# EAGLE board Keyboard (EAGLE 9.4.2)
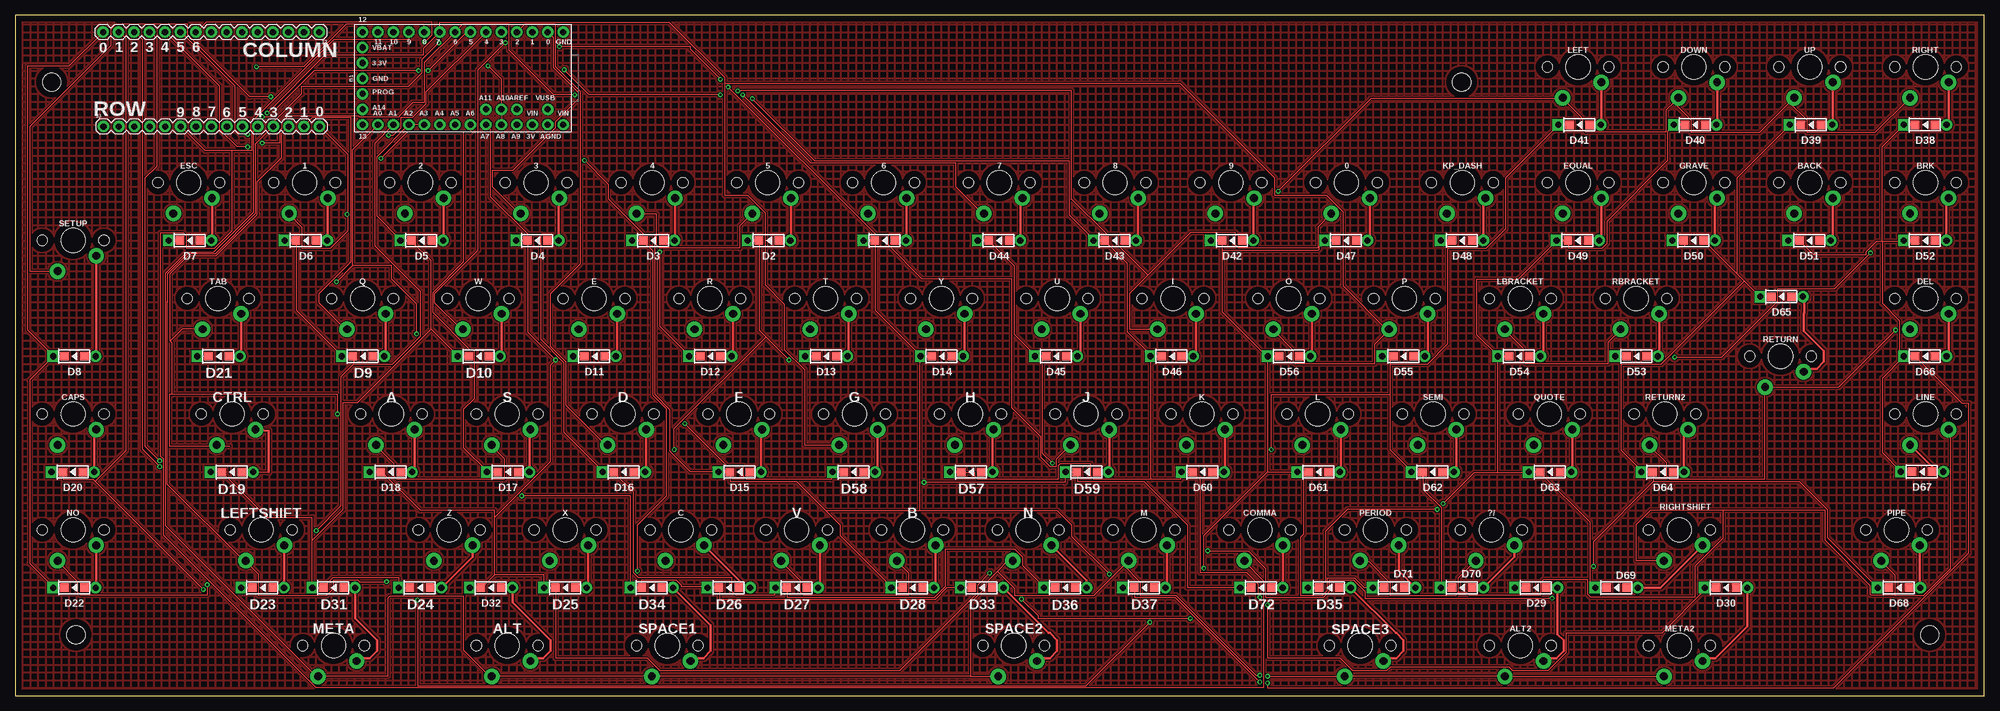
[diagram p0: board, top side]
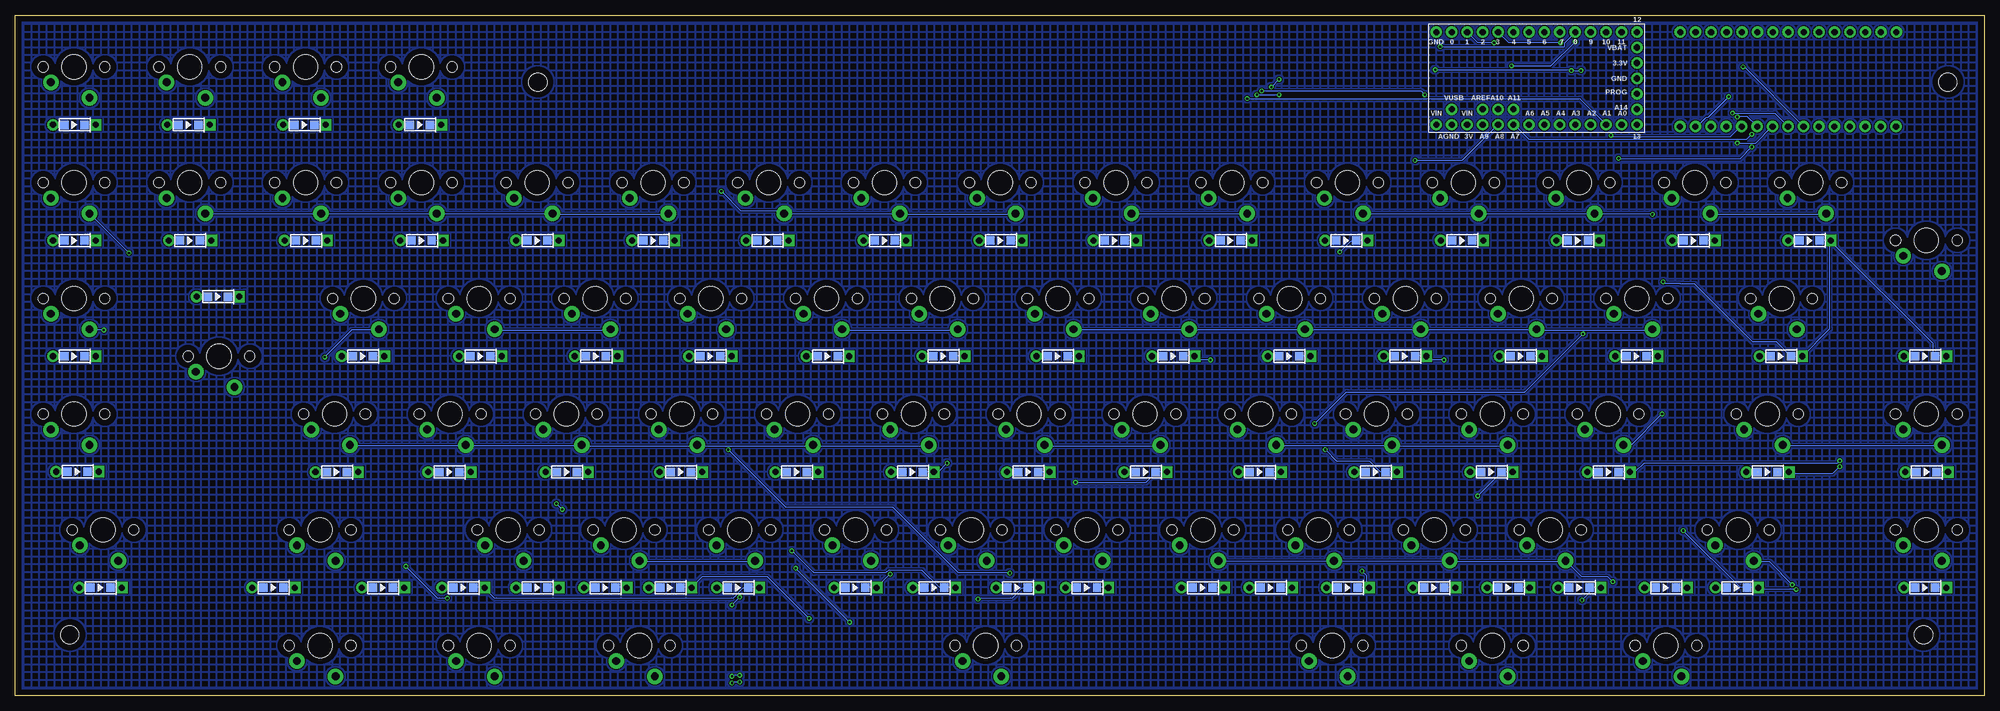
[diagram p1: board, bottom side, seen from below]

Size 324 x 112 mm. Coordinates in mm from the lower left corner, seen from the top.
Outline: 0,0 324,0 324,112 0,112 0,0
Copper layers (1*16): Top 0.035mm / dielectric 1.5mm / Bottom 0.035mm
Design rules "default": minimum track width 6mil, minimum drill 0.35mm, track to track 6mil, track to pad 6mil, pad to pad 6mil, via to via 6mil, smd to smd 6mil, copper to edge 40mil, drill to drill 6mil, minimum pad ring 10mil, minimum via ring 8mil, stop-mask expansion 4mil, vias tented up to drill 0mil, thermal gap 10mil
Holes 3 mm at 6,101 238,101 10,10 315,10

## Footprints (pad centres in the part's own frame; a part is rotated, then mirrored left to right if it is on the bottom)
MX-1U = drill 1.3 pad 2.54: MX1 -3.81,2.54; MX2 2.54,5.08 | hole 4: 0,0 | hole 1.7: -5.08,0; 5.08,0
TEENSY-3.1 = drill 1.016 pad 1.88: 0 7.62,-13.97; 1 7.62,-11.43; 2 7.62,-8.89; 3 7.62,-6.35; 3.3V 2.54,16.51; 3V -7.62,-11.43; 4 7.62,-3.81; 5 7.62,-1.27; 6 7.62,1.27; 7 7.62,3.81; 8 7.62,6.35; 9 7.62,8.89; 10 7.62,11.43; 11 7.62,13.97; 12 7.62,16.51; 13 -7.62,16.51; 14 -7.62,13.97; 15 -7.62,11.43; 16 -7.62,8.89; 17 -7.62,6.35; 18 -7.62,3.81; 19 -7.62,1.27; 20 -7.62,-1.27; 21 -7.62,-3.81; 22 -7.62,-6.35; 23 -7.62,-8.89; A10 -5.08,-6.35; A11 -5.08,-3.81; A14/DAC -5.08,16.51; AGND -7.62,-13.97; AREF -5.08,-8.89; GND 0,16.51; GND1 7.62,-16.51; PROG -2.54,16.51; VBAT 5.08,16.51; VIN -7.62,-16.51; VUSB -5.08,-13.97
DIODE_HAND = smd 1.397 x 1.397: A1 -1.651,0; C1 1.651,0 | drill 1 pad 1.9: A2 -3.5,0 | smd 1.397 x 1.397 bottom: A3 -1.651,0; C3 1.651,0 | drill 1 pad 1.9 square: C2 3.5,0
1X15 = drill 1.016 pad 1.88: 1 0,0; 2 2.54,0; 3 5.08,0; 4 7.62,0; 5 10.16,0; 6 12.7,0; 7 15.24,0; 8 17.78,0; 9 20.32,0; 10 22.86,0; 11 25.4,0; 12 27.94,0; 13 30.48,0; 14 33.02,0; 15 35.56,0

## Placement (x,y rotation side)
0  KEYSWITCH-PLAIN-MX-1U  [MX-1U]  219.07,84.43 180 top
1  KEYSWITCH-PLAIN-MX-1U  [MX-1U]  47.62,84.43 180 top
2  KEYSWITCH-PLAIN-MX-1U  [MX-1U]  66.67,84.43 180 top
3  KEYSWITCH-PLAIN-MX-1U  [MX-1U]  85.72,84.43 180 top
4  KEYSWITCH-PLAIN-MX-1U  [MX-1U]  104.77,84.43 180 top
5  KEYSWITCH-PLAIN-MX-1U  [MX-1U]  123.82,84.43 180 top
6  KEYSWITCH-PLAIN-MX-1U  [MX-1U]  142.87,84.43 180 top
7  KEYSWITCH-PLAIN-MX-1U  [MX-1U]  161.92,84.43 180 top
8  KEYSWITCH-PLAIN-MX-1U  [MX-1U]  180.97,84.43 180 top
9  KEYSWITCH-PLAIN-MX-1U  [MX-1U]  200.02,84.43 180 top
?/  KEYSWITCH-PLAIN-MX-1U  [MX-1U]  242.88,27.28 180 top
A  KEYSWITCH-PLAIN-MX-1U  [MX-1U]  61.91,46.33 180 top
ALT  KEYSWITCH-PLAIN-MX-1U  [MX-1U]  80.96,8.23 180 top
ALT2  KEYSWITCH-PLAIN-MX-1U  [MX-1U]  247.65,8.23 180 top
B  KEYSWITCH-PLAIN-MX-1U  [MX-1U]  147.63,27.28 180 top
B1  TEENSY-3.1SILK  [TEENSY-3.1]  73.66,101.6 90 top
BACK  KEYSWITCH-PLAIN-MX-1U  [MX-1U]  295.27,84.43 180 top
BRK  KEYSWITCH-PLAIN-MX-1U  [MX-1U]  314.32,84.43 180 top
C  KEYSWITCH-PLAIN-MX-1U  [MX-1U]  109.53,27.28 180 top
CAPS  KEYSWITCH-PLAIN-MX-1U  [MX-1U]  9.52,46.33 180 top
COMMA  KEYSWITCH-PLAIN-MX-1U  [MX-1U]  204.78,27.28 180 top
CTRL  KEYSWITCH-PLAIN-MX-1U  [MX-1U]  35.72,46.33 180 top
D  KEYSWITCH-PLAIN-MX-1U  [MX-1U]  100.01,46.33 180 top
D1  [DIODE_HAND]  143.08,74.91 180 top
D2  [DIODE_HAND]  124.03,74.91 180 top
D3  [DIODE_HAND]  104.98,74.91 180 top
D4  [DIODE_HAND]  85.93,74.91 180 top
D5  [DIODE_HAND]  66.88,74.91 180 top
D6  [DIODE_HAND]  47.83,74.91 180 top
D7  [DIODE_HAND]  28.78,74.91 180 top
D8  [DIODE_HAND]  9.73,55.85 180 top
D9  [DIODE_HAND]  57.23,55.85 180 top
D10  [DIODE_HAND]  76.28,55.85 180 top
D11  [DIODE_HAND]  95.33,55.85 180 top
D12  [DIODE_HAND]  114.38,55.85 180 top
D13  [DIODE_HAND]  133.43,55.85 180 top
D14  [DIODE_HAND]  152.48,55.85 180 top
D15  [DIODE_HAND]  119.21,36.8 180 top
D16  [DIODE_HAND]  100.16,36.8 180 top
D17  [DIODE_HAND]  81.11,36.8 180 top
D18  [DIODE_HAND]  61.8,36.8 180 top
D19  [DIODE_HAND]  35.64,36.8 180 top
D20  [DIODE_HAND]  9.48,36.8 180 top
D21  [DIODE_HAND]  33.48,55.85 180 top
D22  [DIODE_HAND]  9.73,17.75 180 top
D23  [DIODE_HAND]  40.72,17.75 180 top
D24  [DIODE_HAND]  66.63,17.75 180 top
D25  [DIODE_HAND]  90.5,17.75 180 top
D26  [DIODE_HAND]  117.43,17.75 180 top
D27  [DIODE_HAND]  128.6,17.75 180 top
D28  [DIODE_HAND]  147.65,17.75 180 top
D29  [DIODE_HAND]  250.27,17.75 180 top
D30  [DIODE_HAND]  281.51,17.75 180 top
D31  [DIODE_HAND]  52.4,17.75 180 top
D32  [DIODE_HAND]  78.31,17.75 180 top
D33  [DIODE_HAND]  159.08,17.75 180 top
D34  [DIODE_HAND]  104.73,17.75 180 top
D35  [DIODE_HAND]  216.23,17.75 180 top
D36  [DIODE_HAND]  172.8,17.75 180 top
D37  [DIODE_HAND]  185.75,17.75 180 top
D38  [DIODE_HAND]  314.28,93.95 180 top
D39  [DIODE_HAND]  295.48,93.95 180 top
D40  [DIODE_HAND]  276.43,93.95 180 top
D41  [DIODE_HAND]  257.38,93.95 180 top
D42  [DIODE_HAND]  200.23,74.91 180 top
D43  [DIODE_HAND]  180.93,74.91 180 top
D44  [DIODE_HAND]  161.88,74.91 180 top
D45  [DIODE_HAND]  171.28,55.85 180 top
D46  [DIODE_HAND]  190.33,55.85 180 top
D47  [DIODE_HAND]  219.03,74.91 180 top
D48  [DIODE_HAND]  238.08,74.91 180 top
D49  [DIODE_HAND]  257.13,74.91 180 top
D50  [DIODE_HAND]  276.18,74.91 180 top
D51  [DIODE_HAND]  295.23,74.91 180 top
D52  [DIODE_HAND]  314.28,74.91 180 top
D53  [DIODE_HAND]  266.78,55.85 180 top
D54  [DIODE_HAND]  247.48,55.85 180 top
D55  [DIODE_HAND]  228.43,55.85 180 top
D56  [DIODE_HAND]  209.63,55.85 180 top
D57  [DIODE_HAND]  157.31,36.8 180 top
D58  [DIODE_HAND]  138,36.8 180 top
D59  [DIODE_HAND]  176.36,36.8 180 top
D60  [DIODE_HAND]  195.41,36.8 180 top
D61  [DIODE_HAND]  214.46,36.8 180 top
D62  [DIODE_HAND]  233.25,36.8 180 top
D63  [DIODE_HAND]  252.56,36.8 180 top
D64  [DIODE_HAND]  271.1,36.8 180 top
D65  [DIODE_HAND]  290.66,65.67 180 top
D66  [DIODE_HAND]  314.28,55.85 180 top
D67  [DIODE_HAND]  313.77,36.85 180 top
D68  [DIODE_HAND]  309.96,17.75 180 top
D69  [DIODE_HAND]  263.48,17.75 180 top
D70  [DIODE_HAND]  238.08,17.75 180 top
D71  [DIODE_HAND]  226.9,17.75 180 top
D72  [DIODE_HAND]  205.06,17.75 180 top
DEL  KEYSWITCH-PLAIN-MX-1U  [MX-1U]  314.32,65.38 180 top
DOWN  KEYSWITCH-PLAIN-MX-1U  [MX-1U]  276.22,103.48 180 top
E  KEYSWITCH-PLAIN-MX-1U  [MX-1U]  95.25,65.38 180 top
EQUAL  KEYSWITCH-PLAIN-MX-1U  [MX-1U]  257.17,84.43 180 top
ESC  KEYSWITCH-PLAIN-MX-1U  [MX-1U]  28.57,84.43 180 top
F  KEYSWITCH-PLAIN-MX-1U  [MX-1U]  119.06,46.33 180 top
G  KEYSWITCH-PLAIN-MX-1U  [MX-1U]  138.11,46.33 180 top
GRAVE  KEYSWITCH-PLAIN-MX-1U  [MX-1U]  276.22,84.43 180 top
H  KEYSWITCH-PLAIN-MX-1U  [MX-1U]  157.16,46.33 180 top
I  KEYSWITCH-PLAIN-MX-1U  [MX-1U]  190.5,65.38 180 top
J  KEYSWITCH-PLAIN-MX-1U  [MX-1U]  176.21,46.33 180 top
J2  [1X15]  50.04,109.22 180 top
J3  [1X15]  14.52,93.67 0 top
K  KEYSWITCH-PLAIN-MX-1U  [MX-1U]  195.26,46.33 180 top
KP_DASH  KEYSWITCH-PLAIN-MX-1U  [MX-1U]  238.12,84.43 180 top
L  KEYSWITCH-PLAIN-MX-1U  [MX-1U]  214.31,46.33 180 top
LBRACKET  KEYSWITCH-PLAIN-MX-1U  [MX-1U]  247.65,65.38 180 top
LEFT  KEYSWITCH-PLAIN-MX-1U  [MX-1U]  257.17,103.48 180 top
LEFTSHIFT  KEYSWITCH-PLAIN-MX-1U  [MX-1U]  40.48,27.28 180 top
LINE  KEYSWITCH-PLAIN-MX-1U  [MX-1U]  314.32,46.33 180 top
M  KEYSWITCH-PLAIN-MX-1U  [MX-1U]  185.73,27.28 180 top
META  KEYSWITCH-PLAIN-MX-1U  [MX-1U]  52.38,8.23 180 top
META2  KEYSWITCH-PLAIN-MX-1U  [MX-1U]  273.84,8.23 180 top
N  KEYSWITCH-PLAIN-MX-1U  [MX-1U]  166.68,27.28 180 top
NO  KEYSWITCH-PLAIN-MX-1U  [MX-1U]  9.52,27.28 180 top
O  KEYSWITCH-PLAIN-MX-1U  [MX-1U]  209.55,65.38 180 top
P  KEYSWITCH-PLAIN-MX-1U  [MX-1U]  228.6,65.38 180 top
PERIOD  KEYSWITCH-PLAIN-MX-1U  [MX-1U]  223.83,27.28 180 top
PIPE  KEYSWITCH-PLAIN-MX-1U  [MX-1U]  309.56,27.28 180 top
Q  KEYSWITCH-PLAIN-MX-1U  [MX-1U]  57.15,65.38 180 top
QUOTE  KEYSWITCH-PLAIN-MX-1U  [MX-1U]  252.41,46.33 180 top
R  KEYSWITCH-PLAIN-MX-1U  [MX-1U]  114.3,65.38 180 top
RBRACKET  KEYSWITCH-PLAIN-MX-1U  [MX-1U]  266.7,65.38 180 top
RETURN  KEYSWITCH-PLAIN-MX-1U  [MX-1U]  290.47,55.85 180 top
RETURN2  KEYSWITCH-PLAIN-MX-1U  [MX-1U]  271.46,46.33 180 top
RIGHT  KEYSWITCH-PLAIN-MX-1U  [MX-1U]  314.32,103.48 180 top
RIGHTSHIFT  KEYSWITCH-PLAIN-MX-1U  [MX-1U]  273.84,27.28 180 top
S  KEYSWITCH-PLAIN-MX-1U  [MX-1U]  80.96,46.33 180 top
SEMI  KEYSWITCH-PLAIN-MX-1U  [MX-1U]  233.31,46.33 180 top
SETUP  KEYSWITCH-PLAIN-MX-1U  [MX-1U]  9.52,74.93 180 top
SPACE1  KEYSWITCH-PLAIN-MX-1U  [MX-1U]  107.3,8.23 180 top
SPACE2  KEYSWITCH-PLAIN-MX-1U  [MX-1U]  164.3,8.23 180 top
SPACE3  KEYSWITCH-PLAIN-MX-1U  [MX-1U]  221.3,8.23 180 top
T  KEYSWITCH-PLAIN-MX-1U  [MX-1U]  133.35,65.38 180 top
TAB  KEYSWITCH-PLAIN-MX-1U  [MX-1U]  33.37,65.38 180 top
U  KEYSWITCH-PLAIN-MX-1U  [MX-1U]  171.45,65.38 180 top
UP  KEYSWITCH-PLAIN-MX-1U  [MX-1U]  295.27,103.48 180 top
V  KEYSWITCH-PLAIN-MX-1U  [MX-1U]  128.58,27.28 180 top
W  KEYSWITCH-PLAIN-MX-1U  [MX-1U]  76.2,65.38 180 top
X  KEYSWITCH-PLAIN-MX-1U  [MX-1U]  90.48,27.28 180 top
Y  KEYSWITCH-PLAIN-MX-1U  [MX-1U]  152.4,65.38 180 top
Z  KEYSWITCH-PLAIN-MX-1U  [MX-1U]  71.43,27.28 180 top

## Library data of the parts
0 1-9 ?/ A ALT ALT2 B BACK BRK C CAPS COMMA CTRL D DEL DOWN E EQUAL ESC F G GRAVE H I J K KP_DASH L LBRACKET LEFT LEFTSHIFT LINE M META META2 N NO O P PERIOD PIPE Q QUOTE R RBRACKET RETURN RETURN2 RIGHT RIGHTSHIFT S SEMI SETUP SPACE1-SPACE3 T TAB U UP V W X Y Z = Keyboard
B1 = SparkFun-Boards; SF_ID: DEV-12646
D1-D72 = Components
J2 J3 = SparkFun-Connectors

## Nets
3.3V: B1.3.3V
3V: B1.3V
AGND: B1.AGND
GND: B1.GND
GND1: B1.GND1
KEYCOLUM0: B1.14 D7.C1 D7.C2 D7.C3 D8.C1 D8.C2 D8.C3 D21.C1 D21.C2 D21.C3 D22.C1 D22.C2 D22.C3 D29.C1 D29.C2 D29.C3 D44.C1 D44.C2 D44.C3 D45.C1 D45.C2 D45.C3 D58.C1 D58.C2 D58.C3 D59.C1 D59.C2 D59.C3 D72.C1 D72.C2 D72.C3 J2.15
KEYCOLUM1: B1.15 D6.C1 D6.C2 D6.C3 D9.C1 D9.C2 D9.C3 D20.C1 D20.C2 D20.C3 D23.C1 D23.C2 D23.C3 D30.C1 D30.C2 D30.C3 D43.C1 D43.C2 D43.C3 D46.C1 D46.C2 D46.C3 D57.C1 D57.C2 D57.C3 D60.C1 D60.C2 D60.C3 J2.14
KEYCOLUM2: B1.16 B1.17 D5.C1 D5.C2 D5.C3 D10.C1 D10.C2 D10.C3 D19.C1 D19.C2 D19.C3 D24.C1 D24.C2 D24.C3 D31.C1 D31.C2 D31.C3 D42.C1 D42.C2 D42.C3 D47.C1 D47.C2 D47.C3 D56.C1 D56.C2 D56.C3 D61.C1 D61.C2 D61.C3 D71.C1 D71.C2 D71.C3 J2.13
KEYCOLUM3: D4.C1 D4.C2 D4.C3 D11.C1 D11.C2 D11.C3 D18.C1 D18.C2 D18.C3 D25.C1 D25.C2 D25.C3 D32.C1 D32.C2 D32.C3 D41.C1 D41.C2 D41.C3 D48.C1 D48.C2 D48.C3 D55.C1 D55.C2 D55.C3 D62.C1 D62.C2 D62.C3 D70.C1 D70.C2 D70.C3 J2.12
KEYCOLUM4: B1.20 D3.C1 D3.C2 D3.C3 D12.C1 D12.C2 D12.C3 D17.C1 D17.C2 D17.C3 D26.C1 D26.C2 D26.C3 D33.C1 D33.C2 D33.C3 D34.C1 D34.C2 D34.C3 D35.C1 D35.C2 D35.C3 D40.C1 D40.C2 D40.C3 D49.C1 D49.C2 D49.C3 D54.C1 D54.C2 D54.C3 D63.C1 D63.C2 D63.C3 D69.C1 D69.C2 D69.C3 J2.11
KEYCOLUM5: B1.21 D2.C1 D2.C2 D2.C3 D13.C1 D13.C2 D13.C3 D16.C1 D16.C2 D16.C3 D27.C1 D27.C2 D27.C3 D36.C1 D36.C2 D36.C3 D39.C1 D39.C2 D39.C3 D50.C1 D50.C2 D50.C3 D53.C1 D53.C2 D53.C3 D64.C1 D64.C2 D64.C3 D65.C1 D65.C2 D65.C3 D68.C1 D68.C2 D68.C3 J2.10
KEYCOLUM6: B1.22 B1.A10 D1.C1 D1.C2 D1.C3 D14.C1 D14.C2 D14.C3 D15.C1 D15.C2 D15.C3 D28.C1 D28.C2 D28.C3 D37.C1 D37.C2 D37.C3 D38.C1 D38.C2 D38.C3 D51.C1 D51.C2 D51.C3 D52.C1 D52.C2 D52.C3 D66.C1 D66.C2 D66.C3 D67.C1 D67.C2 D67.C3 J2.9
KEYROW0: 1.MX2 2.MX2 3.MX2 4.MX2 5.MX2 6.MX2 B1.0 ESC.MX2 J3.15
KEYROW1: B1.1 E.MX2 J3.14 Q.MX2 R.MX2 SETUP.MX2 T.MX2 W.MX2 Y.MX2
KEYROW2: A.MX2 B1.2 CAPS.MX2 CTRL.MX2 D.MX2 F.MX2 J3.13 S.MX2 TAB.MX2
KEYROW3: B1.3 B.MX2 C.MX2 J3.12 LEFTSHIFT.MX2 NO.MX2 V.MX2 X.MX2 Z.MX2
KEYROW4: ALT2.MX2 ALT.MX2 B1.4 J3.11 M.MX2 META2.MX2 META.MX2 N.MX2 SPACE1.MX2 SPACE2.MX2 SPACE3.MX2
KEYROW5: 7.MX2 8.MX2 9.MX2 B1.5 DOWN.MX2 J3.10 LEFT.MX2 RIGHT.MX2 UP.MX2
KEYROW6: 0.MX2 B1.6 BACK.MX2 EQUAL.MX2 GRAVE.MX2 I.MX2 J3.9 KP_DASH.MX2 U.MX2
KEYROW7: B1.7 BRK.MX2 G.MX2 H.MX2 J3.8 LBRACKET.MX2 O.MX2 P.MX2 RBRACKET.MX2
KEYROW8: B1.8 DEL.MX2 J3.7 J.MX2 K.MX2 L.MX2 QUOTE.MX2 RETURN2.MX2 RETURN.MX2 SEMI.MX2
KEYROW9: ?/.MX2 B1.9 COMMA.MX2 J3.6 LINE.MX1 PERIOD.MX2 PIPE.MX2 RIGHTSHIFT.MX2
N$1: 6.MX1 D1.A1 D1.A2 D1.A3
N$2: 5.MX1 D2.A1 D2.A2 D2.A3
N$3: 4.MX1 D3.A1 D3.A2 D3.A3
N$4: 3.MX1 D4.A1 D4.A2 D4.A3
N$5: 2.MX1 D5.A1 D5.A2 D5.A3
N$6: 1.MX1 D6.A1 D6.A2 D6.A3
N$7: D7.A1 D7.A2 D7.A3 ESC.MX1
N$8: D14.A1 D14.A2 D14.A3 Y.MX1
N$9: D13.A1 D13.A2 D13.A3 T.MX1
N$10: D12.A1 D12.A2 D12.A3 R.MX1
N$11: D11.A1 D11.A2 D11.A3 E.MX1
N$12: D10.A1 D10.A2 D10.A3 W.MX1
N$13: D9.A1 D9.A2 D9.A3 Q.MX1
N$14: D8.A1 D8.A2 D8.A3 SETUP.MX1
N$15: D21.A1 D21.A2 D21.A3 TAB.MX1
N$16: CAPS.MX1 D20.A1 D20.A2 D20.A3
N$17: CTRL.MX1 D19.A1 D19.A2 D19.A3
N$18: A.MX1 D18.A1 D18.A2 D18.A3
N$19: D17.A1 D17.A2 D17.A3 S.MX1
N$20: D16.A1 D16.A2 D16.A3 D.MX1
N$21: D15.A1 D15.A2 D15.A3 F.MX1
N$22: B.MX1 D28.A1 D28.A2 D28.A3
N$23: D27.A1 D27.A2 D27.A3 V.MX1
N$24: C.MX1 D26.A1 D26.A2 D26.A3
N$25: D25.A1 D25.A2 D25.A3 X.MX1
N$26: D24.A1 D24.A2 D24.A3 Z.MX1
N$27: D23.A1 D23.A2 D23.A3 LEFTSHIFT.MX1
N$28: D22.A1 D22.A2 D22.A3 NO.MX1
N$29: ALT2.MX1 D29.A1 D29.A2 D29.A3
N$30: D30.A1 D30.A2 D30.A3 META2.MX1
N$31: ALT.MX1 D32.A1 D32.A2 D32.A3
N$32: D33.A1 D33.A2 D33.A3 SPACE2.MX1
N$33: D35.A1 D35.A2 D35.A3 SPACE3.MX1
N$34: D34.A1 D34.A2 D34.A3 SPACE1.MX1
N$35: D36.A1 D36.A2 D36.A3 N.MX1
N$36: D37.A1 D37.A2 D37.A3 M.MX1
N$37: D38.A1 D38.A2 D38.A3 RIGHT.MX1
N$38: D39.A1 D39.A2 D39.A3 UP.MX1
N$39: D40.A1 D40.A2 D40.A3 DOWN.MX1
N$40: D41.A1 D41.A2 D41.A3 LEFT.MX1
N$41: 9.MX1 D42.A1 D42.A2 D42.A3
N$42: 8.MX1 D43.A1 D43.A2 D43.A3
N$43: 7.MX1 D44.A1 D44.A2 D44.A3
N$44: D45.A1 D45.A2 D45.A3 U.MX1
N$45: D46.A1 D46.A2 D46.A3 I.MX1
N$46: 0.MX1 D47.A1 D47.A2 D47.A3
N$47: D48.A1 D48.A2 D48.A3 KP_DASH.MX1
N$48: D49.A1 D49.A2 D49.A3 EQUAL.MX1
N$49: D50.A1 D50.A2 D50.A3 GRAVE.MX1
N$50: BACK.MX1 D51.A1 D51.A2 D51.A3
N$51: BRK.MX1 D52.A1 D52.A2 D52.A3
N$52: D53.A1 D53.A2 D53.A3 RBRACKET.MX1
N$53: D54.A1 D54.A2 D54.A3 LBRACKET.MX1
N$54: D55.A1 D55.A2 D55.A3 P.MX1
N$55: D56.A1 D56.A2 D56.A3 O.MX1
N$56: D57.A1 D57.A2 D57.A3 H.MX1
N$57: D58.A1 D58.A2 D58.A3 G.MX1
N$58: D59.A1 D59.A2 D59.A3 J.MX1
N$59: D60.A1 D60.A2 D60.A3 K.MX1
N$60: D61.A1 D61.A2 D61.A3 L.MX1
N$61: D62.A1 D62.A2 D62.A3 SEMI.MX1
N$62: D63.A1 D63.A2 D63.A3 QUOTE.MX1
N$63: D65.A1 D65.A2 D65.A3 RETURN.MX1
N$64: D64.A1 D64.A2 D64.A3 RETURN2.MX1
N$65: D66.A1 D66.A2 D66.A3 DEL.MX1
N$66: D67.A1 D67.A2 D67.A3 LINE.MX2
N$67: D68.A1 D68.A2 D68.A3 PIPE.MX1
N$68: D69.A1 D69.A2 D69.A3 RIGHTSHIFT.MX1
N$69: ?/.MX1 D70.A1 D70.A2 D70.A3
N$70: D71.A1 D71.A2 D71.A3 PERIOD.MX1
N$71: COMMA.MX1 D72.A1 D72.A2 D72.A3
N$72: D31.A1 D31.A2 D31.A3 META.MX1
VBAT: B1.VBAT
VIN: B1.VIN
VUSB: B1.VUSB

## Tracks (layer width: path | path; a pad name or v marks a point on that pad's centre or on a via)
GND
  pour Bottom (hatched): 0,112 324,112 324,0 0,0
KEYCOLUM0  (via drill 0.35)
  Top 0.152: 27.15,74.77 D7.C1 | B1.14 55.56,89.85 55.56,70.8 | v52.86,68.1 55.56,70.8 | D22.C2 6.19,17.94 2.38,21.75 2.38,51.91 6.19,55.72 D8.C2 6.19,56.04 2.06,60.17 2.06,103.66 8.89,103.66 14.45,109.22 J2.15 | D45.C2 167.8,56.04 164.31,59.53 164.31,70.8 160.34,74.77 D44.C1 | D72.C2 201.45,17.78 192.88,17.78 192.88,28.1 185.74,35.24 174.78,35.24 174.78,36.67 D59.C1 174.62,36.83 172.88,36.83 D59.C2 172.72,36.67 172.72,35.08 v149.54,35.08 | v170.66,38.26 169.07,39.85 169.07,55.72 D45.C1 | 55.56,70.8 61.91,70.8 61.91,68.58 66.04,64.45 v66.04,59.53 | v110.17,44.77 117.16,37.78 119.86,37.78 119.86,36.04 120.33,35.56 134.3,35.56 134.3,36.83 D58.C2 | D21.C1 D21.C2
  Top 0.406: D7.C1 D7.C2 | D44.C1 D44.C2 | D45.C1 D45.C2 | D58.C1 D58.C2 | D8.C1 D8.C2 | D22.C1 D22.C2 | D72.C1 D72.C2 | D29.C1 D29.C2
  Bottom 0.152: 30.07,55.88 D21.C2 | 25.4,74.93 26.99,74.93 D7.C1 | 25.4,74.93 D7.C2 25.24,74.77 8.41,57.94 8.41,55.88 8.1,55.88 D8.C1 7.94,55.88 6.35,55.88 D8.C2 | v52.86,68.1 52.55,67.79 50.1,67.79 | 50.01,67.79 50.1,67.79 | D22.C1 7.94,17.78 6.35,17.78 D22.C2 | D45.C1 169.54,55.88 167.8,55.88 D45.C2 | D44.C1 160.18,74.93 158.43,74.93 D44.C2 | D58.C2 134.62,36.83 136.21,36.83 D58.C1 136.37,36.67 137.95,35.08 v149.54,35.08 | D29.C1 248.6,17.78 246.86,17.78 D29.C2 246.7,17.62 245.11,16.03 205.9,16.03 204.31,17.62 203.52,17.62 D72.C1 203.36,17.78 201.61,17.78 D72.C2 | D59.C1 174.62,36.83 172.88,36.83 D59.C2 172.72,36.83 172.09,36.83 v170.66,38.26 | v66.04,59.53 75.56,50.01 104.93,50.01 v110.17,44.77 | D21.C2 29.93,55.85 25.4,60.39 25.4,74.93 | 50.1,67.79 47.69,67.79 38.1,58.2 34.17,58.2 D21.C1 D21.C2
  other vias: 29.98,55.85
KEYCOLUM1  (via drill 0.35)
  Top 0.152: D9.C2 53.66,56.04 46.2,63.5 46.2,74.77 D6.C1 | B1.15 59.21,90.96 59.21,73.98 66.67,66.52 66.67,59.21 62.07,54.61 55.72,54.61 | 55.72,54.61 55.72,55.72 D9.C1 | 13.18,35.24 12.86,35.56 7.94,35.56 7.94,36.67 D20.C1 | 13.18,35.24 v30.96,17.46 | 13.18,35.24 18.26,40.32 18.26,108.11 17.14,109.22 J2.14 | 55.72,54.61 53.66,52.55 53.66,31.27 v49.53,27.15 | 186.85,35.56 191.77,35.56 191.77,36.67 D60.C2 | 186.85,35.56 177.48,35.56 177.01,36.04 177.01,38.1 171.93,38.1 171.61,37.78 171.61,35.56 158.43,35.56 157.96,36.04 157.96,36.67 155.73,36.67 D57.C1 | v206.06,14.92 206.06,6.19 217.96,6.19 220.03,4.13 225.74,4.13 226.38,4.76 245.75,4.76 246.38,4.13 252.25,4.13 255.27,7.14 255.27,10.32 270.99,10.32 278.13,17.46 D30.C2 | v204.79,16.19 204.47,16.51 204.47,18.41 202.56,20.32 194.94,20.32 194.94,35.56 193.83,36.67 D60.C1 | 186.85,35.56 186.85,55.72 D46.C2 186.85,56.04 183.04,59.85 183.04,71.12 179.39,74.77 D43.C1 | v121.28,98.27 131.6,87.95 173.51,87.95 173.51,79.06 177.48,75.09 D43.C2
  Top 0.406: D6.C1 D6.C2 | D43.C1 D43.C2 | D46.C1 D46.C2 | D60.C1 D60.C2 | D57.C1 D57.C2 | D9.C1 D9.C2 | D20.C1 D20.C2 | D23.C1 D23.C2 | D30.C1 279.63,17.53 278.24,17.53 D30.C2
  Bottom 0.152: D9.C1 55.56,55.88 53.82,55.88 D9.C2 | D6.C1 46.04,74.93 44.45,74.93 D6.C2 | D20.C1 7.78,36.83 6.03,36.83 D20.C2 | v30.96,17.46 36.99,17.46 37.15,17.62 D23.C2 37.31,17.78 39.05,17.78 D23.C1 39.21,17.78 40.16,17.78 v49.53,27.15 | D43.C1 179.23,74.93 177.48,74.93 D43.C2 | D46.C1 188.59,55.88 186.85,55.88 D46.C2 | D30.C1 279.72,17.78 278.13,17.78 D30.C2 | D57.C1 155.57,36.83 153.83,36.83 D57.C2 | D60.C1 193.68,36.83 191.93,36.83 D60.C2 | v204.79,16.19 v206.06,14.92 | B1.15 66.52,98.27 v121.28,98.27
KEYCOLUM2  (via drill 0.35)  (1 unrouted)
  Top 0.152: 198.6,73.34 198.6,74.77 D42.C1 | 198.6,73.34 198.6,63.18 205.74,56.04 D56.C2 206.06,55.72 206.06,36.83 | 206.06,36.83 210.82,36.83 D61.C2 | D71.C2 223.2,17.78 221.93,17.78 220.34,19.37 215.9,19.37 215.9,17.3 215.11,16.51 211.46,16.51 211.46,26.04 211.93,26.51 211.93,36.67 211.93,36.8 | 198.6,73.34 214.47,73.34 214.63,73.5 214.63,73.98 215.42,74.77 D47.C2 | B1.17 B1.16 59.53,88.74 59.53,78.9 63.34,75.09 D5.C2 | 68.42,60.33 68.42,71.6 65.25,74.77 D5.C1 | 68.42,60.33 72.71,56.04 D10.C2 | D31.C1 50.8,17.94 52.23,19.37 63.18,19.37 63.18,17.94 D24.C2 | 48.9,25.56 48.9,17.94 D31.C2 | 48.9,25.56 48.9,29.37 41.42,29.37 D19.C1 D19.C2 | v23.78,37.69 20.95,40.51 20.95,107.95 19.68,109.22 J2.13 | 68.42,60.33 56.36,48.26 53.98,48.26 53.98,30.64 48.9,25.56 | 206.06,36.83 195.58,26.35 v195.58,20.95 | v186.69,12.06 176.21,1.59 66.2,1.59 v66.2,15.72
  Top 0.406: D5.C1 D5.C2 | D42.C1 D42.C2 | D47.C1 D47.C2 | D56.C1 D56.C2 | D56.C2 205.76,55.85 205.74,55.88 206.1,55.88 D56.C2 | D61.C1 211.93,36.8 D61.C2 | D10.C1 D10.C2 | D31.C1 D31.C2 | 32.16,36.83 D19.C2 | D24.C1 D24.C2 | D71.C1 D71.C2
  Bottom 0.152: D47.C1 217.33,74.93 215.58,74.93 D47.C2 | D71.C1 225.11,17.78 223.52,17.78 D71.C2 | D61.C1 212.72,36.83 210.98,36.83 D61.C2 | D56.C1 207.96,55.88 206.22,55.88 D56.C2 | D42.C1 198.44,74.93 196.85,74.93 D42.C2 | D5.C1 65.09,74.93 63.5,74.93 D5.C2 | D10.C1 74.61,55.88 72.87,55.88 D10.C2 | 32.23,36.83 D19.C2 31.91,36.58 24.89,36.58 v23.78,37.69 | D31.C1 50.64,17.78 49.05,17.78 D31.C2 | 64.14,17.78 63.18,17.78 D24.C2 | 64.14,17.78 64.93,17.78 D24.C1 | v186.69,12.06 v195.58,20.95 | 64.14,17.78 v66.2,15.72
KEYCOLUM3  (via drill 0.35)
  Top 0.152: 226.22,54.61 226.22,55.72 D55.C1 | 226.22,54.61 226.22,49.53 | 226.22,49.53 226.22,40.48 229.71,36.99 D62.C2 | D70.C2 234.63,17.94 234.63,30.96 231.62,33.97 231.62,36.67 D62.C1 | 235.74,73.66 235.74,57.94 232.41,54.61 226.22,54.61 | 235.74,73.66 235.74,74.77 D48.C1 | 235.74,73.66 242.09,73.66 245.27,76.83 245.27,85.25 253.84,93.82 D41.C2 | D4.C1 84.3,74.77 84.3,59.85 v88.9,55.24 88.11,54.45 88.11,38.58 78.9,29.37 | 78.9,19.84 76.83,17.78 D32.C1 | 78.9,19.84 87,19.84 87,17.94 D25.C2 | 78.9,19.84 78.9,29.37 | 78.9,29.37 78.9,30.48 66.67,30.48 60.33,36.83 D18.C1 | v23.78,38.64 21.43,40.99 21.43,85.25 23.34,87.15 23.34,108.11 22.23,109.22 J2.12 | 226.22,49.53 206.69,49.53 v206.69,40.48 | v160.34,20.16 158.43,18.26 158.43,16.99 145.57,4.13 106.05,4.13 103.98,6.19 88.9,6.19 88.9,17.62 D25.C1
  Top 0.406: D4.C1 D4.C2 | D48.C1 D48.C2 | D41.C1 D41.C2 | D62.C1 D62.C2 | D55.C1 D55.C2 | D11.C1 D11.C2 | D18.C1 D18.C2 | D32.C1 D32.C2 | D25.C1 D25.C2 | D70.C1 D70.C2
  Bottom 0.152: D41.C1 255.59,93.98 254,93.98 D41.C2 | D48.C1 236.38,74.93 234.63,74.93 D48.C2 | D70.C1 236.38,17.78 234.63,17.78 D70.C2 | D62.C1 231.46,36.83 229.87,36.83 D62.C2 | D55.C1 226.69,55.88 224.95,55.88 D55.C2 | D11.C1 93.66,55.88 91.92,55.88 D11.C2 91.76,55.72 91.28,55.24 v88.9,55.24 | D4.C1 84.14,74.93 82.55,74.93 D4.C2 | D18.C1 60.01,36.83 58.42,36.83 D18.C2 58.26,36.83 57.47,36.83 55.98,38.32 24.1,38.32 v23.78,38.64 | D32.C1 76.52,17.78 74.93,17.78 D32.C2 | D25.C1 88.74,17.78 87.15,17.78 D25.C2 | v206.69,40.48 197.17,30.96 179.55,30.96 168.75,20.16 v160.34,20.16
KEYCOLUM4  (via drill 0.35)
  Top 0.152: v234,30.64 219.23,30.64 215.58,26.99 215.58,18.89 214.63,17.94 D35.C1 | v234.95,31.59 240.03,36.67 244,36.67 | 244,36.67 248.92,36.67 D63.C2 | 244,36.67 244,55.72 D54.C2 243.84,56.04 240.51,59.37 240.51,68.58 247.33,68.58 253.52,74.77 D49.C2 | D69.C2 260.03,17.94 259.08,18.89 259.08,28.57 250.98,36.67 D63.C1 | D40.C2 272.89,93.82 271.94,92.87 271.94,88.11 261.94,78.11 261.94,74.45 261.14,73.66 255.59,73.66 255.59,74.77 D49.C1 | v38.26,90.33 36.51,90.33 33.66,93.19 33.66,100.33 24.77,109.22 J2.11 | v60.17,88.42 64.45,92.71 73.82,92.71 | 73.82,92.71 74.93,92.71 B1.20 | v106.05,73.03 106.05,60.8 110.81,56.04 D12.C2 | v83.34,32.86 101.28,32.86 101.28,17.94 D34.C2 | D26.C2 113.19,17.94 109.54,17.94 109.54,18.26 108.74,19.05 103.03,19.05 103.03,17.94 D34.C1 | D33.C2 155.42,17.78 153.35,17.78 151.45,15.88 115.89,15.88 115.89,17.62 D26.C1 | v102.39,20.48 102.39,28.1 107.16,32.86 107.16,47.15 104.93,49.37 104.93,73.18 103.35,74.77 D3.C1 | 73.82,92.71 73.82,71.44 68.74,66.36 68.74,63.02 74.93,56.83 75.56,56.83 75.56,48.9 73.82,47.15 73.82,40.8 77.63,36.99 D17.C2 | v193.36,12.7 168.28,12.7 168.28,13.18 v165.58,15.88
  Top 0.406: D3.C1 D3.C2 | D49.C1 D49.C2 | D40.C1 D40.C2 | D54.C1 D54.C2 | D54.C2 243.87,55.85 243.84,55.88 243.95,55.88 D54.C2 | D63.C1 D63.C2 | D12.C1 D12.C2 | D17.C1 D17.C2 | D34.C1 D34.C2 | D26.C2 113.31,17.75 113.28,17.78 113.9,17.78 D26.C2 | D26.C2 D26.C1 | D33.C1 D33.C2 | D35.C1 D35.C2 | D69.C1 D69.C2
  Bottom 0.152: D40.C1 274.64,93.98 273.05,93.98 D40.C2 | D49.C1 255.43,74.93 253.68,74.93 D49.C2 | D69.C1 261.78,17.78 260.03,17.78 D69.C2 | D54.C1 245.75,55.88 244,55.88 D54.C2 | D35.C1 214.47,17.78 212.88,17.78 D35.C2 212.72,17.78 210.98,19.53 200.18,19.53 v193.36,12.7 | D63.C1 250.82,36.83 249.08,36.83 D63.C2 | v234.95,31.59 v234,30.64 | v38.26,90.33 40.16,88.42 v60.17,88.42 | D12.C1 112.71,55.88 110.97,55.88 D12.C2 | D3.C2 101.6,74.93 103.19,74.93 D3.C1 103.35,74.77 104.3,74.77 v106.05,73.03 | D33.C2 155.73,17.78 157.32,17.78 D33.C1 157.48,17.62 158.43,17.62 160.02,16.03 165.42,16.03 v165.58,15.88 | D26.C1 115.73,17.78 113.98,17.78 D26.C2 | D17.C2 77.63,36.83 79.38,36.83 D17.C1 79.53,36.67 v83.34,32.86 | 101.6,17.78 101.28,17.78 D34.C2 101.6,17.78 | 101.6,17.78 103.03,17.78 D34.C1 | v102.39,20.48 101.6,19.68 101.6,17.78
KEYCOLUM5  (via drill 0.35)
  Top 0.152: 283.37,69.37 278.76,73.98 274.64,73.98 274.64,74.77 D50.C1 | 283.37,69.37 284.48,68.26 | 284.48,68.26 287.02,65.72 D65.C2 | 283.37,69.37 283.37,85.25 291.94,93.82 D39.C2 | D68.C1 308.29,17.78 306.55,17.78 D68.C2 306.39,17.78 298.13,26.04 298.13,30.64 293.53,35.24 269.56,35.24 | 264.32,54.61 264.32,40.32 267.65,36.99 D64.C2 | 264.32,54.61 264.32,55.72 264.32,55.85 | 269.56,35.24 269.56,36.67 D64.C1 | 284.48,68.26 270.83,54.61 264.32,54.61 | v38.26,92.39 36.99,92.39 36.2,93.19 36.2,100.33 27.3,109.22 J2.10 | 123.51,59.05 122.4,60.17 122.4,74.77 D2.C1 | 123.51,59.05 v127.32,55.24 | D16.C1 98.58,36.67 101.76,33.5 101.76,20.16 102.55,19.37 117.95,19.37 117.95,17.14 118.59,16.51 124.94,16.51 124.94,17.78 D27.C2 | D36.C2 169.23,17.94 165.74,21.43 165.74,22.86 164.47,24.13 153.03,24.13 153.03,17.94 151.29,16.19 127,16.19 127,17.62 D27.C1 | 123.51,59.05 108.43,43.97 v108.43,40.48 | B1.21 78.26,93.19 78.26,82.07 84.45,75.88 86.52,75.88 86.52,58.58 90.33,54.77 90.33,43.34 96.68,36.99 D16.C2 | 269.56,35.24 259.71,25.4 v259.71,21.27 | v252.89,16.03 222.09,16.03 222.09,17.14 220.19,19.05 216.22,19.05 216.22,17.14 215.26,16.19 205.74,16.19 205.74,20.95 202.88,23.81 v196.22,23.81
  Top 0.406: D2.C1 D2.C2 | D50.C1 D50.C2 | D39.C1 292.12,93.95 292.1,93.98 292.01,93.98 D39.C2 | D65.C1 D65.C2 | D53.C1 264.32,55.85 D53.C2 | D64.C1 D64.C2 | D13.C1 D13.C2 | D16.C1 D16.C2 | D27.C1 D27.C2 | D36.C1 D36.C2
  Bottom 0.152: D39.C1 293.69,93.98 292.1,93.98 D39.C2 | D65.C1 288.93,65.72 287.18,65.72 D65.C2 | D50.C1 274.48,74.93 272.73,74.93 D50.C2 | D68.C1 308.29,17.78 306.55,17.78 D68.C2 | D53.C1 265.11,55.88 263.37,55.88 D53.C2 | D64.C1 269.4,36.83 267.65,36.83 D64.C2 | v38.26,92.39 39.05,91.6 74.93,91.6 77.31,93.98 B1.21 | D13.C1 131.76,55.88 130.02,55.88 D13.C2 129.86,55.72 129.38,55.24 v127.32,55.24 | D2.C1 122.24,74.93 120.65,74.93 D2.C2 | D36.C2 169.39,17.78 171.13,17.78 D36.C1 171.29,17.78 171.93,17.78 174.78,20.64 180.34,20.64 180.82,20.16 192.56,20.16 v196.22,23.81 | D16.C2 96.68,36.83 98.42,36.83 D16.C1 98.58,36.83 99.38,36.83 101.12,38.58 106.52,38.58 v108.43,40.48 | D27.C1 126.84,17.78 125.25,17.78 D27.C2 | v259.71,21.27 254.48,16.03 v252.89,16.03
KEYCOLUM6  (via drill 0.35)
  Top 0.152: D67.C2 310.2,36.99 307.18,40.01 307.18,52.23 310.67,55.72 D66.C2 310.83,56.04 310.04,56.83 310.04,61.75 307.18,64.61 307.18,74.77 | 307.18,74.77 310.67,74.77 D52.C2 | 307.18,74.77 306.23,74.77 304.48,73.03 304.48,72.55 295.91,72.55 293.69,74.77 D51.C1 | 307.18,74.77 307.18,90.33 310.67,93.82 D38.C2 | v67.31,107.63 67.47,107.63 68.58,108.74 68.58,110.81 31.43,110.81 29.84,109.22 J2.9 | v77.79,103.66 80.01,101.44 B1.A10 B1.22 | D1.C1 141.45,74.77 141.45,63.5 148.91,56.04 D14.C2 148.91,55.72 148.91,30.48 | 133.35,30.48 128.59,35.24 117.63,35.24 117.63,36.67 D15.C1 | 133.35,30.48 135.73,28.1 135.73,26.35 144.15,17.94 D28.C2 | v180.02,20 173.83,26.19 173.83,28.1 171.45,30.48 148.91,30.48 | 133.35,30.48 148.91,30.48 | v93.66,88.11 97.63,84.14 97.63,81.76 103.5,75.88 105.25,75.88 105.25,49.53 107.79,46.99 107.79,40.16 111.12,36.83 115.57,36.83 D15.C2 | v206.06,2.06 206.06,1.27 299.24,1.27 321.47,23.5 321.47,48.1 320.36,48.1 312.74,55.72 D66.C1 | v204.79,2.22 190.82,16.19 184.15,16.19 184.15,17.62 D37.C1
  Top 0.406: D1.C1 D1.C2 | D51.C1 D51.C2 | D52.C1 D52.C2 | D38.C1 D38.C2 | D66.C1 D66.C2 | D67.C1 D67.C2 | D14.C1 D14.C2 | D15.C1 D15.C2 | D28.C1 D28.C2 | D37.C1 D37.C2
  Bottom 0.152: D67.C1 312.1,36.83 310.36,36.83 D67.C2 | D66.C1 312.58,55.88 310.83,55.88 D66.C2 | D38.C1 312.58,93.98 310.83,93.98 D38.C2 | D51.C1 293.53,74.93 291.78,74.93 D51.C2 | D52.C1 312.58,74.93 310.83,74.93 D52.C2 | v67.31,107.63 71.28,103.66 v77.79,103.66 | D14.C1 150.81,55.88 149.07,55.88 D14.C2 | D1.C1 141.29,74.93 139.7,74.93 D1.C2 | D37.C1 183.99,17.78 182.4,17.78 D37.C2 182.25,17.78 v180.02,20 | D28.C1 145.89,17.78 144.3,17.78 D28.C2 | D15.C1 117.47,36.83 115.73,36.83 D15.C2 | B1.22 85.88,88.11 v93.66,88.11 | v206.06,2.06 205.9,2.22 v204.79,2.22
KEYROW0  (via drill 0.35)
  Top 0.152: 4.MX2 102.23,79.22 105.57,79.22 105.57,74.14 106.05,73.66 119.22,73.66 119.22,77.31 121.13,79.22 5.MX2 | B1.0 88.58,108.27 88.58,103.35 92.71,99.22 92.71,98.27 88.9,94.46 88.9,93.5 81.92,86.52 78.58,86.52 78.58,83.66 83.03,79.22 3.MX2 | 54.77,79.22 54.77,76.52 51.91,73.66 47.15,73.66 47.15,77.15 45.09,79.22 1.MX2 | 54.77,79.22 54.77,89.06 50.16,93.66 J3.15 | 54.77,79.22 v54.61,79.22
  Bottom 0.152: 6.MX2 140.18,79.22 121.28,79.22 5.MX2 | ESC.MX2 26.04,79.22 44.93,79.22 1.MX2 | v54.61,79.22 63.98,79.22 2.MX2 64.14,79.22 83.03,79.22 3.MX2 83.19,79.22 102.08,79.22 4.MX2
KEYROW1  (via drill 0.35)
  Top 0.152: J3.14 47.62,93.82 48.9,95.09 55.24,95.09 55.24,71.44 50.01,66.2 50.01,64.61 54.29,60.33 54.61,60.33 Q.MX2 | v42.07,98.58 38.58,98.58 28.42,108.74 28.42,110.49 16.51,110.49 15.72,109.7 15.72,107 2.38,93.66 2.38,69.85 6.83,69.85 SETUP.MX2 | v80.64,107.47 76.2,103.03 76.2,73.34 69.06,66.2 69.06,64.61 73.34,60.33 73.66,60.33 W.MX2
  Bottom 0.152: v42.07,98.58 45.4,95.25 45.72,95.25 47.15,93.82 47.47,93.82 J3.14 | B1.1 83.34,107.47 v80.64,107.47 | 73.66,60.17 92.71,60.17 | 92.71,60.17 E.MX2 92.71,60.17 | 73.66,60.17 W.MX2 73.66,60.17 | 92.71,60.17 111.76,60.17 | 111.76,60.17 R.MX2 111.76,60.17 | 111.76,60.17 130.81,60.17 | 130.81,60.17 T.MX2 130.81,60.17 | 130.81,60.17 149.86,60.17 Y.MX2 | 73.66,60.17 54.61,60.17 Q.MX2
KEYROW2  (via drill 0.35)
  Top 0.152: 25.54,58.34 25.76,58.13 25.76,49.53 | 25.54,58.34 25.49,58.39 25.49,69.43 28.45,72.39 33.04,72.39 39.8,79.15 39.85,79.15 39.85,84.61 43.81,88.58 43.81,92.55 44.93,93.66 J3.13 | TAB.MX2 30.7,60.17 TAB.MX2 | CTRL.MX2 35.3,41.02 25.37,41.02 25.37,49.53 25.76,49.53 | TAB.MX2 27.5,60.3 25.54,58.34 | A.MX2 59.37,41.12 62.39,38.1 62.39,36.04 62.87,35.56 80.49,35.56 80.49,39.05 78.42,41.12 S.MX2 | B1.2 83.82,110.49 88.9,110.49 88.9,103.5 93.03,99.38 93.03,71.12 88.11,66.2 88.11,57.47 90.65,54.93 90.65,47.78 97.31,41.12 D.MX2 | 25.76,49.53 30.96,49.53 53.02,49.53 v53.02,46.35
  Bottom 0.152: CAPS.MX2 6.98,41.15 33.17,41.15 CTRL.MX2 | F.MX2 116.36,41.12 97.47,41.12 D.MX2 97.31,41.12 78.42,41.12 S.MX2 | v53.02,46.35 58.1,41.27 59.21,41.27 A.MX2
KEYROW3  (via drill 0.35)
  Top 0.152: V.MX2 126.05,22.07 129.22,18.89 129.22,16.99 129.7,16.51 147,16.51 147,20.16 145.1,22.07 B.MX2 | 25.05,64.7 25.05,34.8 37.78,22.07 LEFTSHIFT.MX2 37.94,22.07 40.01,20 40.01,16.51 51.28,16.51 52.39,17.62 52.39,19.05 56.36,19.05 56.67,18.73 v61.12,18.73 | 25.05,64.7 25.05,64.83 | v69.69,107.47 66.99,104.78 66.99,102.55 64.77,100.33 47.15,100.33 47.15,99.06 42.55,94.46 42.55,93.82 J3.12 42.39,93.66 39.53,90.81 39.53,79.31 32.91,72.69 28.33,72.69 25.05,69.42 25.05,64.7 | v31.59,18.26 31.59,16.51 10.79,16.51 10.32,16.99 10.32,18.73 6.99,22.07 NO.MX2
  Bottom 0.152: V.MX2 125.89,22.07 107,22.07 C.MX2 106.84,22.07 87.95,22.07 X.MX2 87.79,22.07 68.9,22.07 Z.MX2 68.74,22.07 66.2,19.53 61.91,19.53 v61.12,18.73 | B1.3 78.26,107.47 v69.69,107.47 | v31.59,18.26 35.4,22.07 37.78,22.07 LEFTSHIFT.MX2
KEYROW4  (via drill 0.35)
  Top 0.152: J3.11 39.85,93.66 39.21,93.03 39.21,79.57 39.2,79.57 32.63,73 28.2,73 24.73,69.53 24.73,27.97 49.69,3.02 META.MX2 49.85,3.17 61.28,3.17 61.28,16.03 61.59,16.35 73.82,16.35 73.82,7.46 78.26,3.02 ALT.MX2 78.42,3.17 104.62,3.17 SPACE1.MX2 104.78,3.17 157.16,3.17 | B1.4 67.63,99.38 67.63,97.47 65.41,95.25 63.5,95.25 63.5,93.5 62.23,92.23 v61.44,92.23 | 245.11,3.17 218.92,3.17 SPACE3.MX2 218.76,3.17 v206.06,3.17 | 245.11,3.17 ALT2.MX2 245.11,3.17 | 245.11,3.17 271.14,3.17 META2.MX2 | 157.16,3.17 161.61,3.17 SPACE2.MX2 | 157.16,3.17 157.16,15.24 159.7,17.78 159.7,18.57 161.61,20.48 | 161.61,20.48 163.19,22.07 163.99,22.07 N.MX2 | 182.4,21.43 177.48,16.51 164.47,16.51 164.47,17.62 161.61,20.48 | 182.4,21.43 183.04,22.07 M.MX2 182.4,21.43 | v204.79,3.33 204.15,3.33 190.98,16.51 185.1,16.51 185.1,18.73 182.4,21.43
  Bottom 0.152: v61.44,92.23 61.12,91.92 41.91,91.92 40.16,93.66 40.01,93.66 J3.11 | v206.06,3.17 205.9,3.33 v204.79,3.33
KEYROW5  (via drill 0.35)
  Top 0.152: v40.64,95.25 42.86,95.25 42.86,96.52 49.21,102.87 v66.36,102.87 | v67.94,102.87 74.3,109.22 B1.5 | 272.89,97.63 273.53,98.27 DOWN.MX2 272.89,97.63 | 272.89,97.63 271.62,96.36 271.62,92.71 258.44,92.71 257.97,93.19 257.97,94.93 254.63,98.27 LEFT.MX2 254.48,98.27 223.04,98.27 v207.8,83.03 | 291.94,97.63 287.02,92.71 275.75,92.71 275.75,94.77 272.89,97.63 | 291.94,97.63 292.58,98.27 UP.MX2 291.94,97.63 | 291.94,97.63 294.8,94.77 294.8,92.71 306.07,92.71 311.63,98.27 RIGHT.MX2 | v90.33,103.03 94.46,98.9 v116.05,98.9 | v119.7,98.9 130.97,87.63 154.78,87.63 154.78,83.66 159.23,79.22 7.MX2
  Bottom 0.152: v40.64,95.25 40.48,95.41 39.05,95.41 37.47,93.82 J3.10 | v66.36,102.87 v67.94,102.87 68.1,103.03 v90.33,103.03 | 7.MX2 159.38,79.22 178.28,79.22 8.MX2 178.44,79.22 197.33,79.22 9.MX2 197.49,79.38 197.96,79.85 204.63,79.85 v207.8,83.03 | v119.7,98.9 v116.05,98.9
KEYROW6  (via drill 0.35)
  Top 0.152: v40.64,90.96 43.5,90.96 43.5,93.03 43.81,93.34 43.81,94.3 44.93,95.41 56.52,95.41 56.67,95.25 63.18,95.25 63.18,95.41 65.41,97.63 67.31,97.63 67.31,104.14 B1.6 73.66,110.49 81.28,110.49 81.28,106.2 88.58,98.9 v92.08,98.9 | 186.37,69.22 193.36,76.2 200.82,76.2 200.82,74.14 201.29,73.66 214.31,73.66 214.31,77.15 216.38,79.22 0.MX2 | 186.37,69.22 183.36,66.2 183.36,60.33 187.96,60.33 I.MX2 | v118.9,99.54 173.83,99.54 173.83,81.76 179.71,75.88 181.61,75.88 181.61,73.98 186.37,69.22
  Bottom 0.152: v40.64,90.96 37.62,90.96 34.92,93.66 J3.9 | U.MX2 168.91,60.17 187.96,60.17 I.MX2 | 0.MX2 216.53,79.22 235.43,79.22 KP_DASH.MX2 235.59,79.22 254.48,79.22 EQUAL.MX2 254.63,79.22 273.53,79.22 GRAVE.MX2 273.69,79.22 292.58,79.22 BACK.MX2 | v92.08,98.9 92.71,99.54 v118.9,99.54
KEYROW7  (via drill 0.35)
  Top 0.152: 225.9,60.01 226.06,60.17 P.MX2 225.9,60.01 | 225.9,60.01 223.68,57.78 223.68,54.61 210.66,54.61 210.34,54.93 210.34,56.83 207.01,60.17 O.MX2 | LBRACKET.MX2 245.11,60.17 248.13,57.15 248.13,55.09 248.6,54.61 262.1,54.61 262.1,58.1 264.16,60.17 RBRACKET.MX2 | v305.28,72.87 299.4,66.99 290.04,66.99 290.04,64.93 280.83,55.72 v273.05,55.72 | v41.43,95.89 50.96,105.41 67.15,105.41 67.15,106.52 B1.7 69.85,110.81 107.63,110.81 116.68,101.76 116.68,100.81 | 116.68,100.81 116.68,82.39 120.49,82.39 123.35,79.53 123.35,67.63 126.52,64.45 126.52,56.99 129.86,53.66 129.86,41.27 135.41,41.27 G.MX2 | 225.9,60.01 218.44,67.47 218.44,79.69 215.74,82.39 207.17,82.39 207.17,85.25 191.61,100.81 116.68,100.81
  Bottom 0.152: v305.28,72.87 311.63,79.22 BRK.MX2 | v273.05,55.72 268.61,60.17 264.16,60.17 RBRACKET.MX2 | P.MX2 226.06,60.17 245.11,60.17 LBRACKET.MX2 | G.MX2 135.57,41.12 154.46,41.12 H.MX2 | v41.43,95.89 34.45,95.89 32.38,93.82 J3.8
KEYROW8  (via drill 0.35)
  Top 0.152: RETURN2.MX2 268.92,41.12 271.78,38.26 271.78,36.04 272.26,35.56 287.81,35.56 287.81,50.64 RETURN.MX2 287.97,50.8 300.04,50.8 v309.4,60.17 | v39.69,103.5 47.47,103.5 54.45,110.49 67.31,110.49 B1.8 | v89.53,106.84 111.12,106.84 111.12,106.36 v116.05,101.44 | v117.32,100.17 141.6,75.88 143.67,75.88 143.67,74.14 149.22,68.58 163.99,68.58 163.99,47.31 168.75,42.55 168.75,39.21 170.34,37.62 171.29,37.62 171.29,38.89 173.51,41.12 J.MX2
  Bottom 0.152: v309.4,60.17 311.63,60.17 DEL.MX2 | v39.69,103.5 39.53,103.5 29.84,93.82 J3.7 | J.MX2 173.67,41.12 192.56,41.12 K.MX2 192.72,41.12 211.61,41.12 L.MX2 211.77,41.12 230.66,41.12 SEMI.MX2 230.82,41.12 249.71,41.12 QUOTE.MX2 249.87,41.12 268.76,41.12 RETURN2.MX2 | B1.8 69.06,107.47 69.06,106.84 v89.53,106.84 | v117.32,100.17 v116.05,101.44
KEYROW9
  Top 0.152: 35.72,89.69 38.89,89.69 38.89,93.03 38.73,93.19 38.73,94.3 52.39,107.95 64.77,107.95 B1.9 | 35.72,89.69 31.27,89.69 27.3,93.66 J3.6 | 237.49,16.99 237.49,19.37 240.19,22.07 ?/.MX2 | 237.49,16.99 237.01,16.51 226.22,16.51 226.22,18.57 222.73,22.07 221.3,22.07 PERIOD.MX2 | 280.99,30.48 297.81,30.48 297.81,25.56 305.28,18.1 305.28,16.67 305.44,16.51 309.25,16.51 | 280.99,30.48 269.08,30.48 266.7,28.1 266.7,22.23 271.14,22.23 RIGHTSHIFT.MX2 | 309.25,16.51 309.25,19.84 307.02,22.07 PIPE.MX2 | 309.25,16.51 314.01,16.51 318.45,20.95 318.45,43.34 318.13,43.66 LINE.MX1 | 237.49,16.99 238.76,16.99 239.24,16.51 250.98,16.51 250.98,18.57 251.46,19.05 258.76,19.05 258.76,16.67 259.24,16.19 276.38,16.19 276.38,21.27 280.99,25.88 280.99,30.48 | 35.72,89.69 35.72,76.52 32.86,73.66 28.1,73.66 28.1,75.72 27.62,76.2 23.97,76.2 23.97,39.4 24.42,38.96 24.42,26.38 49.53,1.27 205.42,1.27 205.42,18.89 202.25,22.07 COMMA.MX2
  Bottom 0.152: COMMA.MX2 202.25,22.07 221.14,22.07 PERIOD.MX2
N$1
  Top 0.406: 6.MX1 146.68,75 D1.A2 D1.A3
  Bottom 0.152: D1.A3 144.78,74.93 146.53,74.93 D1.A2
N$2
  Top 0.406: 5.MX1 127.63,75 | 127.63,75 D2.A2 | D2.A3 125.78,75 127.63,75
  Bottom 0.152: D2.A3 125.73,74.93 127.48,74.93 D2.A2
N$3
  Top 0.406: 4.MX1 108.58,75 D3.A2 D3.A3
  Bottom 0.152: D3.A3 106.68,74.93 108.43,74.93 D3.A2
N$4
  Top 0.406: 3.MX1 89.43,81.79 D4.A2 D4.A3
  Bottom 0.152: D4.A3 87.63,74.93 89.38,74.93 D4.A2
N$5
  Top 0.406: 2.MX1 70.48,75 D5.A2 D5.A3
  Bottom 0.152: D5.A3 68.58,74.93 70.33,74.93 D5.A2
N$6
  Top 0.406: 1.MX1 51.43,75 D6.A2 D6.A3
  Bottom 0.152: D6.A3 49.53,74.93 51.28,74.93 D6.A2
N$7
  Top 0.406: ESC.MX1 32.38,75 D7.A2 D7.A3
  Bottom 0.152: D7.A3 30.48,74.93 32.23,74.93 D7.A2
N$8
  Top 0.406: Y.MX1 156.21,56.09 D14.A2 D14.A3
  Bottom 0.152: D14.A3 154.15,55.88 155.89,55.88 D14.A2
N$9
  Top 0.406: T.MX1 137.16,56.09 137.06,55.98 | 137.06,55.98 D13.A2 | D13.A3 135.21,55.98 137.06,55.98
  Bottom 0.152: D13.A3 135.1,55.88 136.84,55.88 D13.A2
N$10
  Top 0.406: R.MX1 118.11,56.09 D12.A2 D12.A3
  Bottom 0.152: D12.A3 116.05,55.88 117.79,55.88 D12.A2
N$11
  Top 0.406: E.MX1 99.06,56.09 D11.A2 D11.A3
  Bottom 0.152: D11.A3 97,55.88 98.74,55.88 D11.A2
N$12
  Top 0.406: W.MX1 80.01,56.09 D10.A2 | D10.A2 | D10.A3 D10.A2 | D10.A2
  Bottom 0.152: D10.A3 77.95,55.88 79.69,55.88 D10.A2
N$13
  Top 0.406: Q.MX1 60.96,56.09 D9.A2 D9.A3
  Bottom 0.152: D9.A3 58.9,55.88 60.64,55.88 D9.A2
N$14
  Top 0.406: SETUP.MX1 13.33,55.95 D8.A2 D8.A3
  Bottom 0.152: D8.A3 11.43,55.88 13.18,55.88 D8.A2
N$15  (1 unrouted)
  Top 0.152: D21.A2 D21.A3
  Top 0.406: TAB.MX1 37.18,56.05 D21.A2
N$16
  Top 0.406: CAPS.MX1 12.98,43.44 D20.A2 D20.A3
  Bottom 0.152: D20.A3 11.27,36.83 12.86,36.83 D20.A2
N$17  (1 unrouted)
  Top 0.152: 37.4,36.8 37.7,36.8 | 37.7,36.8 41.66,36.8 41.68,36.83 | D19.A2 37.7,36.8 | D19.A3 37.4,36.8 | 37.4,36.8 37.7,36.8 | D19.A3 37.4,36.8 | D19.A3 37.29,36.59 36.9,36.2 36.9,36.41 D19.A3
  Top 0.406: CTRL.MX1 41.68,43.59 41.68,36.83
N$18
  Top 0.406: A.MX1 65.72,37.22 D18.A2 D18.A3
  Bottom 0.152: D18.A3 63.5,36.83 65.25,36.83 D18.A2
N$19
  Top 0.406: S.MX1 84.61,43.63 D17.A2 D17.A3
  Bottom 0.152: D17.A3 82.87,36.83 84.45,36.83 D17.A2
N$20
  Top 0.406: D.MX1 103.82,36.97 D16.A2 D16.A3
  Bottom 0.152: D16.A3 101.92,36.83 103.5,36.83 D16.A2
N$21
  Top 0.406: F.MX1 122.71,43.63 D15.A2 D15.A3
  Bottom 0.152: D15.A3 120.97,36.83 122.56,36.83 D15.A2
N$22
  Top 0.406: B.MX1 151.44,18.04 D28.A2 D28.A3
  Bottom 0.152: D28.A3 149.38,17.78 151.13,17.78 D28.A2
N$23
  Top 0.406: V.MX1 132.39,18.04 D27.A2 D27.A3
  Bottom 0.152: D27.A3 130.33,17.78 132.08,17.78 D27.A2
N$24
  Top 0.406: C.MX1 120.33,17.75 D26.A2 D26.A3
  Bottom 0.152: D26.A3 119.22,17.78 120.81,17.78 D26.A2
N$25
  Top 0.406: X.MX1 94.29,18.04 D25.A2 D25.A3
  Bottom 0.152: D25.A3 92.23,17.78 93.98,17.78 D25.A2
N$26
  Top 0.406: Z.MX1 75.24,22.87 D24.A2 | D24.A2 | D24.A3 69.37,17.75 69.6,17.53 69.9,17.53 D24.A2
  Bottom 0.152: D24.A3 68.42,17.78 70.01,17.78 D24.A2
N$27
  Top 0.152: D23.A3 42.39,17.78 43.02,17.78 43.2,17.75
  Top 0.406: LEFTSHIFT.MX1 44.29,18.89 43.18,17.78 43.2,17.75 D23.A2
  Bottom 0.152: D23.A3 42.39,17.78 44.13,17.78 D23.A2
N$28
  Top 0.406: NO.MX1 13.33,17.85 | 13.33,17.85 D22.A2 | D22.A3 D22.A2 | D22.A2 13.33,17.85
  Bottom 0.152: D22.A3 11.43,17.78 13.18,17.78 D22.A2
N$29
  Top 0.406: D29.A2 253.77,17.53 | 253.77,17.53 253.77,10.12 254.8,9.09 254.8,7.37 253.59,6.16 251.93,6.16 ALT2.MX1 | D29.A3 253.54,17.75 253.77,17.53
  Bottom 0.152: D29.A3 251.94,17.78 253.68,17.78 D29.A2
N$30
  Top 0.406: META2.MX1 278.12,6.16 279.78,6.16 285.01,11.4 285.01,17.27 | 285.01,17.27 D30.A2 | D30.A3 284.53,17.75 285.01,17.27
  Bottom 0.152: D30.A3 283.21,17.78 284.96,17.78 D30.A2
N$31
  Top 0.406: ALT.MX1 85.24,6.16 86.9,6.16 88.11,7.37 88.11,9.09 81.81,15.38 D32.A2 D32.A3
  Bottom 0.152: D32.A3 80.01,17.78 81.76,17.78 D32.A2
N$32
  Top 0.406: SPACE2.MX1 168.58,6.16 170.24,6.16 171.45,7.37 171.45,9.09 170.24,10.3 170.04,10.3 D33.A2 D33.A3
  Bottom 0.152: D33.A3 160.81,17.78 162.56,17.78 D33.A2
N$33
  Top 0.406: SPACE3.MX1 225.58,6.16 227.24,6.16 228.45,7.37 228.45,9.09 227.24,10.3 227.19,10.3 D35.A2 D35.A3
  Bottom 0.152: D35.A3 217.96,17.78 219.71,17.78 D35.A2
N$34
  Top 0.406: SPACE1.MX1 111.58,6.16 113.24,6.16 114.45,7.37 114.45,11.53 D34.A2 D34.A3
  Bottom 0.152: D34.A3 106.52,17.78 108.11,17.78 D34.A2
N$35
  Top 0.406: N.MX1 176.3,18.93 D36.A2 D36.A3
  Bottom 0.152: D36.A3 174.47,17.78 176.21,17.78 D36.A2
N$36
  Top 0.406: M.MX1 189.54,18.04 D37.A2 D37.A3
  Bottom 0.152: D37.A3 187.48,17.78 189.23,17.78 D37.A2
N$37
  Top 0.406: RIGHT.MX1 318.13,94.31 D38.A2 D38.A3
  Bottom 0.152: D38.A3 316.07,93.98 317.66,93.98 D38.A2
N$38
  Top 0.406: UP.MX1 299.08,94.05 | 299.08,94.05 D39.A2 | D39.A3 297.23,94.05 299.08,94.05
  Bottom 0.152: D39.A3 297.18,93.98 298.93,93.98 D39.A2
N$39
  Top 0.406: DOWN.MX1 280.03,94.61 279.4,93.98 279.43,93.95 D40.A2 D40.A3
  Bottom 0.152: D40.A3 278.13,93.98 279.88,93.98 D40.A2
N$40
  Top 0.406: LEFT.MX1 260.98,94.05 | 260.98,94.05 D41.A2 | D41.A3 259.13,94.05 260.98,94.05
  Bottom 0.152: D41.A3 259.08,93.98 260.83,93.98 D41.A2
N$41
  Top 0.406: 9.MX1 203.73,81.79 D42.A2 D42.A3
  Bottom 0.152: D42.A3 201.93,74.93 203.68,74.93 D42.A2
N$42
  Top 0.406: 8.MX1 184.78,75.26 D43.A2 D43.A3
  Bottom 0.152: D43.A3 182.72,74.93 184.31,74.93 D43.A2
N$43
  Top 0.406: 7.MX1 165.38,81.54 D44.A2 D44.A3
  Bottom 0.152: D44.A3 163.67,74.93 165.26,74.93 D44.A2
N$44
  Top 0.406: U.MX1 175.26,56.34 175.03,56.11 | 175.03,56.11 D45.A2 | D45.A3 173.18,56.11 175.03,56.11
  Bottom 0.152: D45.A3 173.04,55.88 174.62,55.88 D45.A2
N$45
  Top 0.406: I.MX1 194.31,56.34 D46.A2 D46.A3
  Bottom 0.152: D46.A3 192.09,55.88 193.68,55.88 D46.A2
N$46
  Top 0.406: 0.MX1 222.88,75.26 D47.A2 D47.A3
  Bottom 0.152: D47.A3 220.82,74.93 222.41,74.93 D47.A2
N$47
  Top 0.406: KP_DASH.MX1 241.58,81.54 D48.A2 D48.A3
  Bottom 0.152: D48.A3 239.87,74.93 241.46,74.93 D48.A2
N$48
  Top 0.406: EQUAL.MX1 260.98,75.26 D49.A2 D49.A3
  Bottom 0.152: D49.A3 258.92,74.93 260.51,74.93 D49.A2
N$49
  Top 0.406: GRAVE.MX1 279.68,81.54 D50.A2 D50.A3
  Bottom 0.152: D50.A3 277.97,74.93 279.56,74.93 D50.A2
N$50
  Top 0.406: BACK.MX1 299.08,75.26 D51.A2 D51.A3
  Bottom 0.152: D51.A3 297.02,74.93 298.61,74.93 D51.A2
N$51
  Top 0.406: BRK.MX1 317.78,81.54 D52.A2 D52.A3
  Bottom 0.152: D52.A3 316.07,74.93 317.66,74.93 D52.A2
N$52
  Top 0.406: RBRACKET.MX1 270.51,56.09 D53.A2 D53.A3
  Bottom 0.152: D53.A3 268.45,55.88 270.19,55.88 D53.A2
N$53
  Top 0.406: LBRACKET.MX1 251.46,56.34 D54.A2 D54.A3
  Bottom 0.152: D54.A3 249.24,55.88 250.82,55.88 D54.A2
N$54
  Top 0.406: P.MX1 232.41,56.34 D55.A2 231.9,55.88 230.1,55.88 D55.A3
  Bottom 0.152: D55.A3 230.19,55.88 231.78,55.88 D55.A2
N$55
  Top 0.406: O.MX1 213.36,55.88 | 213.36,55.88 213.34,55.85 D56.A2 | D56.A3 211.31,55.88 213.36,55.88
  Bottom 0.152: D56.A3 211.3,55.88 213.04,55.88 D56.A2
N$56
  Top 0.406: H.MX1 160.81,43.63 D57.A2 D57.A3
  Bottom 0.152: D57.A3 159.07,36.83 160.66,36.83 D57.A2
N$57
  Top 0.406: G.MX1 141.92,37.22 D58.A2 D58.A3
  Bottom 0.152: D58.A3 139.7,36.83 141.45,36.83 D58.A2
N$58
  Top 0.152: D59.A3 178.12,36.83 179.71,36.83 D59.A2
  Top 0.406: J.MX1 180.02,36.97 D59.A2
  Bottom 0.152: D59.A3 178.12,36.83 179.71,36.83 D59.A2
N$59
  Top 0.406: K.MX1 199.07,36.97 D60.A2 D60.A3
  Bottom 0.152: D60.A3 197.17,36.83 198.75,36.83 D60.A2
N$60
  Top 0.406: L.MX1 218.12,36.97 D61.A2 D61.A3
  Bottom 0.152: D61.A3 216.22,36.83 217.81,36.83 D61.A2
N$61
  Top 0.406: SEMI.MX1 237.12,37.17 D62.A2 D62.A3
  Bottom 0.152: D62.A3 234.95,36.83 236.7,36.83 D62.A2
N$62
  Top 0.406: QUOTE.MX1 256.22,36.97 | 256.22,36.97 D63.A2 | D63.A3 254.37,36.97 256.22,36.97
  Bottom 0.152: D63.A3 254.32,36.83 255.91,36.83 D63.A2
N$63
  Top 0.406: RETURN.MX1 294.75,53.78 296.41,53.78 297.62,54.99 297.62,56.71 294.28,60.05 294.28,62.89 294.39,62.99 294.39,65.44 294.21,65.61 | 294.21,65.61 D65.A2 | D65.A3 D65.A2 | D65.A2 294.21,65.61
  Bottom 0.152: D65.A3 292.42,65.72 294,65.72 D65.A2
N$64
  Top 0.406: RETURN2.MX1 274.6,43.12 D64.A2 D64.A3
  Bottom 0.152: D64.A3 272.89,36.83 274.48,36.83 D64.A2
N$65
  Top 0.406: DEL.MX1 318.13,56.21 D66.A2 D66.A3
  Bottom 0.152: D66.A3 316.07,55.88 317.66,55.88 D66.A2
N$66
  Top 0.152: D67.A3 315.44,36.99 315.6,37.15 315.6,37.31 315.66,37.37
  Top 0.406: D67.A2 316.18,36.85 315.66,37.37 LINE.MX2
  Bottom 0.152: D67.A3 315.44,36.83 317.18,36.83 D67.A2
N$67
  Top 0.152: D68.A3 311.63,17.78 313.21,17.78 D68.A2
  Top 0.406: PIPE.MX1 313.37,17.84 D68.A2
  Bottom 0.152: D68.A3 311.63,17.78 313.37,17.78 D68.A2
N$68
  Top 0.406: RIGHTSHIFT.MX1 270.67,17.75 D69.A2 D69.A3
  Bottom 0.152: D69.A3 265.27,17.78 266.86,17.78 D69.A2
N$69
  Top 0.406: ?/.MX1 246.69,22.87 D70.A2 D70.A3
  Bottom 0.152: D70.A3 239.87,17.78 241.46,17.78 D70.A2
N$70
  Top 0.406: PERIOD.MX1 227.64,20.52 D71.A2 D71.A3
  Bottom 0.152: D71.A3 228.6,17.78 230.35,17.78 D71.A2
N$71
  Top 0.406: COMMA.MX1 208.59,17.79 | 208.59,17.79 D72.A2 | D72.A3 206.74,17.79 208.59,17.79
  Bottom 0.152: D72.A3 206.85,17.78 208.44,17.78 D72.A2
N$72
  Top 0.406: META.MX1 55.9,5.98 56.09,6.16 58.32,6.16 59.53,7.37 59.53,9.09 55.9,12.71 D31.A2 D31.A3
  Bottom 0.152: D31.A3 54.13,17.78 55.88,17.78 D31.A2
VCC
  pour Top (hatched): 0,112 324,112 324,0 0,0

## Text on the board
tPlace: 0 | 1 | 2 | 3 | 4 | 5 | 6 | COLUMN | ROW | 9 | 8 | 7 | 6 | 5 | 4 | 3 | 2 | 1 | 0